# EAGLE board 245_gas detection (EAGLE 9.6.2)
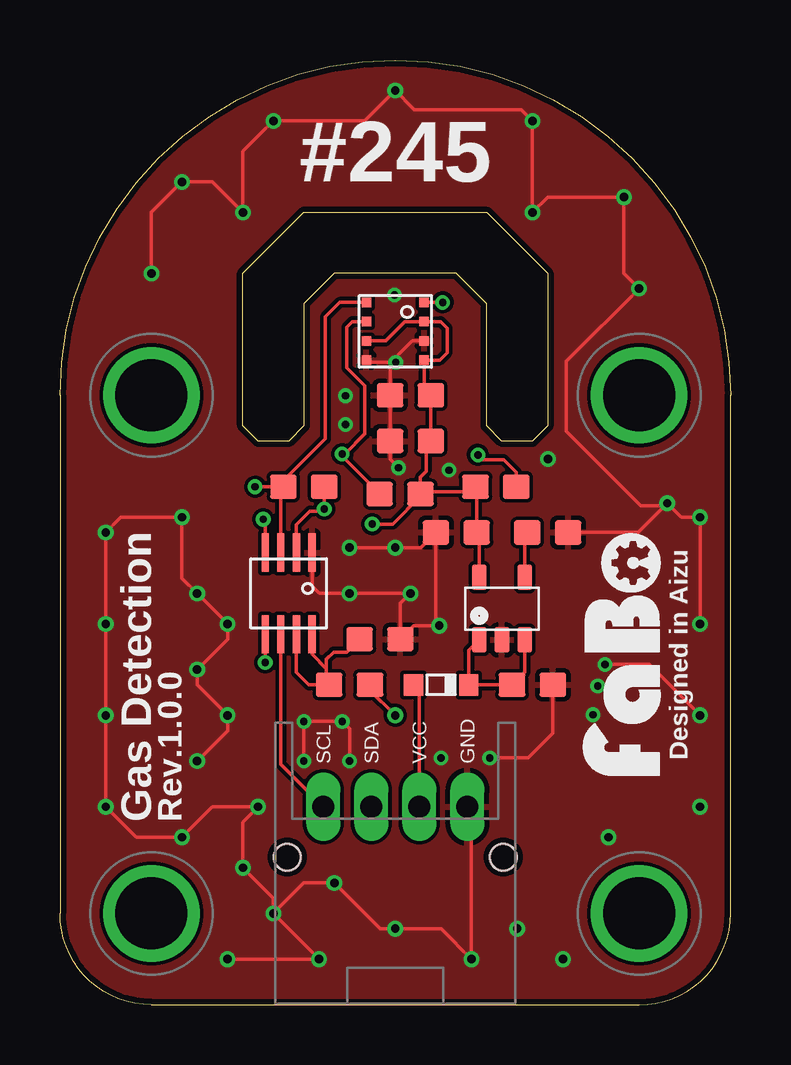
[diagram p0: board, top side]
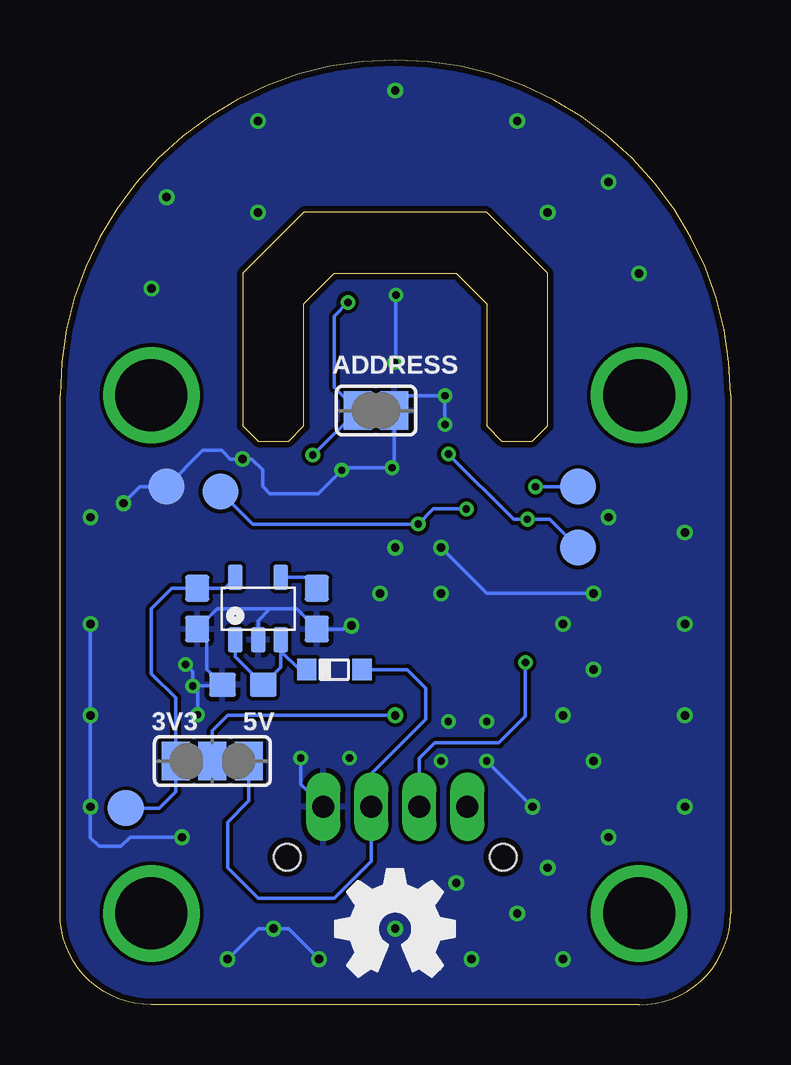
[diagram p1: board, bottom side, seen from below]

Size 27.94 x 39.37 mm. Coordinates in mm from the lower left corner, seen from the top.
Outline: 9.53,23.5 8.26,23.5 7.62,24.13 7.62,30.48 10.16,33.02 17.78,33.02 20.32,30.48 20.32,24.13 19.68,23.5 18.41,23.5 17.78,24.13 17.78,29.21 16.51,30.48 11.43,30.48 10.16,29.21 10.16,24.13 9.53,23.5
Copper layers (1*16): Top 0.035mm / dielectric 1.6mm / Bottom 0.035mm
Design rules "PCBway": minimum track width 6mil, minimum drill 12mil, track to track 6mil, track to pad 6mil, pad to pad 6mil, via to via 6mil, smd to smd 6mil, copper to edge 10mil, drill to drill 10mil, minimum pad ring 10mil, minimum via ring 6mil, stop-mask expansion 2mil, vias tented up to drill 100mil, thermal gap 8mil

## Footprints (pad centres in the part's own frame; a part is rotated, then mirrored left to right if it is on the bottom)
BOSCH-BME680 = smd 0.4 x 0.4: 1 -1.2,1.2; 2 -0.4,1.2; 3 0.4,1.2; 4 1.2,1.2; 5 1.2,-1.2; 6 0.4,-1.2; 7 -0.4,-1.2; 8 -1.2,-1.2
0603 = smd 1.1 x 1: 1 -0.85,0; 2 0.85,0
CUS05F40 = smd 0.8 x 0.9: A -1.15,0; C 1.15,0
SOT-23-5 = smd 0.6 x 1.05: 1 -0.95,-1.3; 2 0,-1.3; 3 0.95,-1.3; 4 0.95,1.3; 5 -0.95,1.3
8PIN-SSOP = smd 0.3 x 1.6: 1 -0.975,-1.7; 2 -0.325,-1.7; 3 0.325,-1.7; 4 0.975,-1.7; 5 0.975,1.7; 6 0.325,1.7; 7 -0.325,1.7; 8 -0.975,1.7
FABO_BRICK_I2C = drill 0.9 pad 1.422 long: GND 3,-10.795; SCL -3,-10.795; SDA -1,-10.795; VCC 1,-10.795 | drill 3 pad 3.81: P$1 -10.16,6.35; P$2 10.16,6.35; P$3 -10.16,-15.24; P$4 10.16,-15.24 | hole 1.1: -4.5,-12.895; 4.5,-12.895
SJ = smd 1.168 x 1.6: 1 -0.762,0; 2 0.762,0
SJ_2 = smd 1.168 x 1.6: 1 -1.524,0; 2 0,0; 3 1.524,0
TP-15 = smd 1.5 x 1.5: 1 0,0

## Placement (x,y rotation side)
B1  [BOSCH-BME680]  13.97,28.07 90 top
C1  4.7uF  [0603]  16.51,19.68 0 top
C2  0.1uF  [0603]  13.34,15.24 180 top
C3  0.01uF  [0603]  20.32,19.68 180 top
C4  1uF  [0603]  19.68,13.34 180 top
C5  100nf  [0603]  14.61,25.4 0 top
C6  100nf  [0603]  14.61,23.5 0 top
C7  0.01uF  [0603]  17.25,16.51 90 bottom
C8  4.7uF  [0603]  22.23,16.51 90 bottom
C9  1uF  [0603]  20.32,13.34 0 bottom
D1  CUS05F40  [CUS05F40]  15.88,13.34 0 top
D2  CUS05F40  [CUS05F40]  16.51,13.97 180 bottom
IC1  [SOT-23-5]  19.68,16.51 0 bottom
IC2  [SOT-23-5]  18.41,16.51 0 top
IC3  [8PIN-SSOP]  9.53,17.14 180 top
J1  [FABO_BRICK_I2C]  13.97,19.05 0 top
LOGO1  [LOGO_FABO_M]  25.4,14.61 90 top
R1  4.7k  [0603]  10.16,21.59 0 top
R2  4.7k  [0603]  14.17,21.29 0 top
R3  200k  [0603]  12.06,13.34 0 top
R4  10k  [0603]  18.16,21.59 180 top
SJ1  [SJ]  14.77,24.77 180 bottom
SJ2  [SJ_2]  21.59,10.16 180 bottom
TP1  [TP-15]  6.35,19.05 0 bottom
TP2  [TP-15]  6.35,21.59 0 bottom
TP3  [TP-15]  21.25,21.39 0 bottom
TP4  [TP-15]  23.5,21.59 0 bottom
TP5  [TP-15]  25.2,8.2 0 bottom
U$2  [LOGO_OSHW_M_BOTTOM]  13.97,3.17 0 top

## Library data of the parts
B1 = FaBo-Mems
C1-C9 = FaBo-Capacitor
D1 D2 = FaBo-Diode
IC1 IC2 TP1-TP5 = FaBo-Supply
IC3 = FaBo-LevelTranslator
J1 = FaBo-Template
LOGO1 = component
R1-R4 = FaBo-Resistors
SJ1 SJ2 = jumper
U$2 = FaBo-etc

## Nets
1V8: B1.2 B1.6 B1.8 C1.2 C5.2 C6.2 IC2.5 IC3.2 R1.2 R2.2 R4.2 TP3.1
3V3: C8.2 IC1.5 SJ2.3 TP5.1
5V: D1.A D2.A J1.VCC SJ2.1
GND: B1.1 B1.7 C1.1 C2.1 C3.1 C4.1 C5.1 C6.1 C7.1 C8.1 C9.1 IC1.2 IC2.2 IC3.1 J1.GND SJ1.1 TP4.1
N$1: C2.2 IC3.7 IC3.8 R3.1
N$2: B1.5 R4.1 SJ1.2
N$3: C3.2 IC2.4
N$4: C4.2 D1.C IC2.1 IC2.3
N$5: R3.2 SJ2.2
N$7: C7.2 IC1.4
N$8: C9.2 D2.C IC1.1 IC1.3
SCL: B1.4 IC3.3 R1.1 TP2.1
SCL_HV: IC3.6 J1.SCL
SDA: B1.3 IC3.4 R2.1 TP1.1
SDA_HV: IC3.5 J1.SDA

## Tracks (layer width: path | path; a pad name or v marks a point on that pad's centre or on a via)
1V8  (via drill 0.3)
  Top 0.152: IC2.5 17.46,19.58 C1.2 17.36,21.54 R4.2 17.11,21.39 15.12,21.39 R2.2 | R2.2 15.02,21.99 15.26,22.23 15.26,23.3 C6.2 C5.2 15.17,25.68 B1.8 15.82,26.87 16.13,27.18 16.13,28.19 15.86,28.47 B1.6 14.37,28.47 13.57,27.67 B1.2 | IC3.2 9.85,20.01 10.41,20.57 10.92,20.57 v11.01,20.66 R1.2 | R2.2 15.02,21.19 13.87,20.04 v13.01,20.04
  Bottom 0.152: v11.01,20.66 12.38,20.66 v13.01,20.04 19.9,20.04 TP3.1
3V3
  Bottom 0.152: IC1.5 21.09,17.36 C8.2 23.28,17.36 24.13,16.51 24.13,13.8 23.11,12.79 SJ2.3 23.11,8.89 23.8,8.2 TP5.1
5V
  Top 0.152: J1.VCC 14.97,13.09 D1.A
  Bottom 0.152: SJ2.1 20.07,8.51 20.95,7.62 20.95,5.71 19.68,4.45 16.51,4.45 14.97,5.99 14.97,8.2 J1.VCC 14.97,9.63 12.7,11.9 12.7,13.2 13.47,13.97 D2.A
GND  (via drill 0.3, 0.35)
  Top 0.152: C3.1 24.09,19.68 25.2,20.8 | 25.2,20.8 v25.3,20.9 25.88,20.32 v26.67,20.32 v26.67,15.88 | C4.1 20.54,11.31 19.51,10.29 v17.91,10.29 | IC3.1 10.5,17.44 10.79,17.14 v12.06,17.14 v14.61,17.14 14.19,16.73 C2.1 14.74,15.8 v15.8,15.8 15.66,15.94 C1.1 15.03,19.05 v13.97,19.05 v12.06,19.05 | J1.GND 17.14,8.08 v17.14,1.91 15.88,3.17 v13.97,3.17 13.34,3.17 v11.43,5.08 10.16,5.08 v8.89,3.81 | v8.89,3.81 v10.79,1.91 v6.99,1.91 | v8.89,3.81 8.89,4.45 v7.62,5.71 7.62,7.62 v8.26,8.26 6.35,8.26 v5.08,6.99 3.17,6.99 v1.91,8.26 v1.91,12.06 v1.91,15.88 v1.91,19.68 2.54,20.32 v5.08,20.32 5.08,17.78 v5.71,17.14 v6.99,15.88 6.99,15.24 v5.71,13.97 5.71,13.34 v6.99,12.06 6.99,11.43 v5.71,10.16 | v10.16,10.16 v10.16,11.81 v11.76,11.81 12.06,11.51 v12.06,10.16 | v22.71,14.19 24.55,14.19 v26.67,12.06 | v13.99,26.77 13.76,26.54 C5.1 C6.1 13.76,22.73 v14.1,22.38 | v13.99,26.77 13.99,26.99 14.67,27.67 B1.7 | B1.1 12.86,26.77 v13.99,26.77 | v3.81,30.48 3.81,33.02 v5.08,34.29 6.35,34.29 v7.62,33.02 7.62,35.56 v8.89,36.83 12.7,36.83 v13.97,38.1 14.77,37.3 19.21,37.3 v19.68,36.83 v19.68,33.02 20.32,33.66 v23.5,33.66 23.5,30.48 v24.13,29.84 21.1,26.82 21.1,23.9 24.2,20.8 25.2,20.8
  Bottom 0.152: IC1.2 19.68,16.02 19.2,16.5 | 19.2,16.5 18.09,16.5 C7.1 16.14,15.66 16,15.8 v15.8,15.8 | v25.3,20.9 24.61,21.59 TP4.1 21.98,23.1 21.2,23.1 20.84,22.75 v20.33,22.75 19.95,22.75 19.5,22.3 19.5,21.6 19.2,21.3 17.18,21.3 v16.2,22.28 16.1,22.38 v14.1,22.38 14.01,22.47 SJ1.1 13.39,25.38 v11.9,25.38 v11.9,24.18 | J1.GND 17.91,9.19 v17.91,10.29 | v8.26,8.26 v10.16,10.16 | v17.14,1.91 18.41,3.17 v19.05,3.17 19.68,3.17 v20.95,1.91 | v22.86,6.99 25.02,6.99 25.4,6.6 26.3,6.6 26.67,6.97 v26.67,8.26 v26.67,12.06 v26.67,15.88 | v22.21,12.09 22.21,13.09 v22.41,13.29 | v22.41,13.29 21.22,13.29 C9.1 21.82,13.99 21.82,15.26 C8.1 21.39,16.5 19.2,16.5 | v22.41,13.29 22.41,13.89 v22.71,14.19 | v12.06,19.05 10.16,17.14 v5.71,17.14 | v13.94,29.57 13.94,26.82 v13.99,26.77
  other vias: 15.88,10.29
  pour Bottom (isolate 0.152): 0,0 27.94,0 27.94,39.37 0,39.37
  pour Top (isolate 0.152): 0,0 27.94,0 27.94,39.37 0,39.37
N$1
  Top 0.152: IC3.7 9.85,13.85 10.37,13.34 11.1,13.34 | 11.1,13.34 R3.1 | IC3.8 10.5,14.6 11.1,14 | 11.1,14 11.1,13.34 | C2.2 11.95,14.7 11.4,14.7 11.1,14.4 11.1,14
N$2  (via drill 0.3)
  Top 0.152: B1.5 v15.95,29.27 | R4.1 19.01,22.19 18.48,22.72 17.61,22.72 v17.41,22.92
  Bottom 0.152: v15.95,29.27 16.51,28.7 16.51,25.74 SJ1.2 17.38,22.92 v17.41,22.92
N$3
  Top 0.152: IC2.4 19.36,19.58 C3.2
N$4
  Top 0.152: IC2.3 19.36,13.87 C4.2 D1.C 17.02,14.77 IC2.1
N$5  (via drill 0.35)
  Top 0.152: v13.97,12.06 12.91,13.12 R3.2
  Bottom 0.152: SJ2.2 21.59,11.43 20.95,12.06 v13.97,12.06
N$7
  Bottom 0.152: IC1.4 17.7,17.81 C7.2
N$8
  Bottom 0.152: IC1.1 20.64,14.5 C9.2 18.73,14.07 18.73,14.73 | D2.C 17.69,14 18,14 18.73,14.73 | 18.73,14.73 IC1.3
SCL  (via drill 0.3)
  Top 0.152: B1.4 11.65,29.27 11.05,28.67 11.05,23.59 9.31,21.84 R1.1 | IC3.3 9.2,21.48 R1.1 | R1.1 v8.13,21.59
  Bottom 0.152: v8.13,21.59 TP2.1
SCL_HV
  Top 0.152: IC3.6 9.2,10.03 J1.SCL
SDA  (via drill 0.3)
  Top 0.152: B1.3 12.18,28.47 11.96,28.24 11.96,26.54 12.7,25.8 12.7,23.8 11.86,22.95 v11.76,22.95 11.76,22.85 R2.1 | IC3.4 8.55,20.15 v8.47,20.23
  Bottom 0.152: v11.76,22.95 9.04,20.23 v8.47,20.23 7.53,20.23 TP1.1
SDA_HV  (via drill 0.3)
  Top 0.152: IC3.5 v8.55,14.27
  Bottom 0.152: v8.55,14.27 8.55,12.02 9.65,10.92 12.32,10.92 12.97,10.27 J1.SDA

## Text on the board
tPlace: #245 | Designed in Aizu | Gas Detection | Rev.1.0.0
bPlace: ADDRESS | 5V | 3V3
Document: 245 Gas Detection 2020/6/7 | Note / To inspect the voltage
tDocu: BME688 | LP2985-18
bDocu: LP2985-33